# EAGLE board LedDancer_Schem (EAGLE 9.6.2)
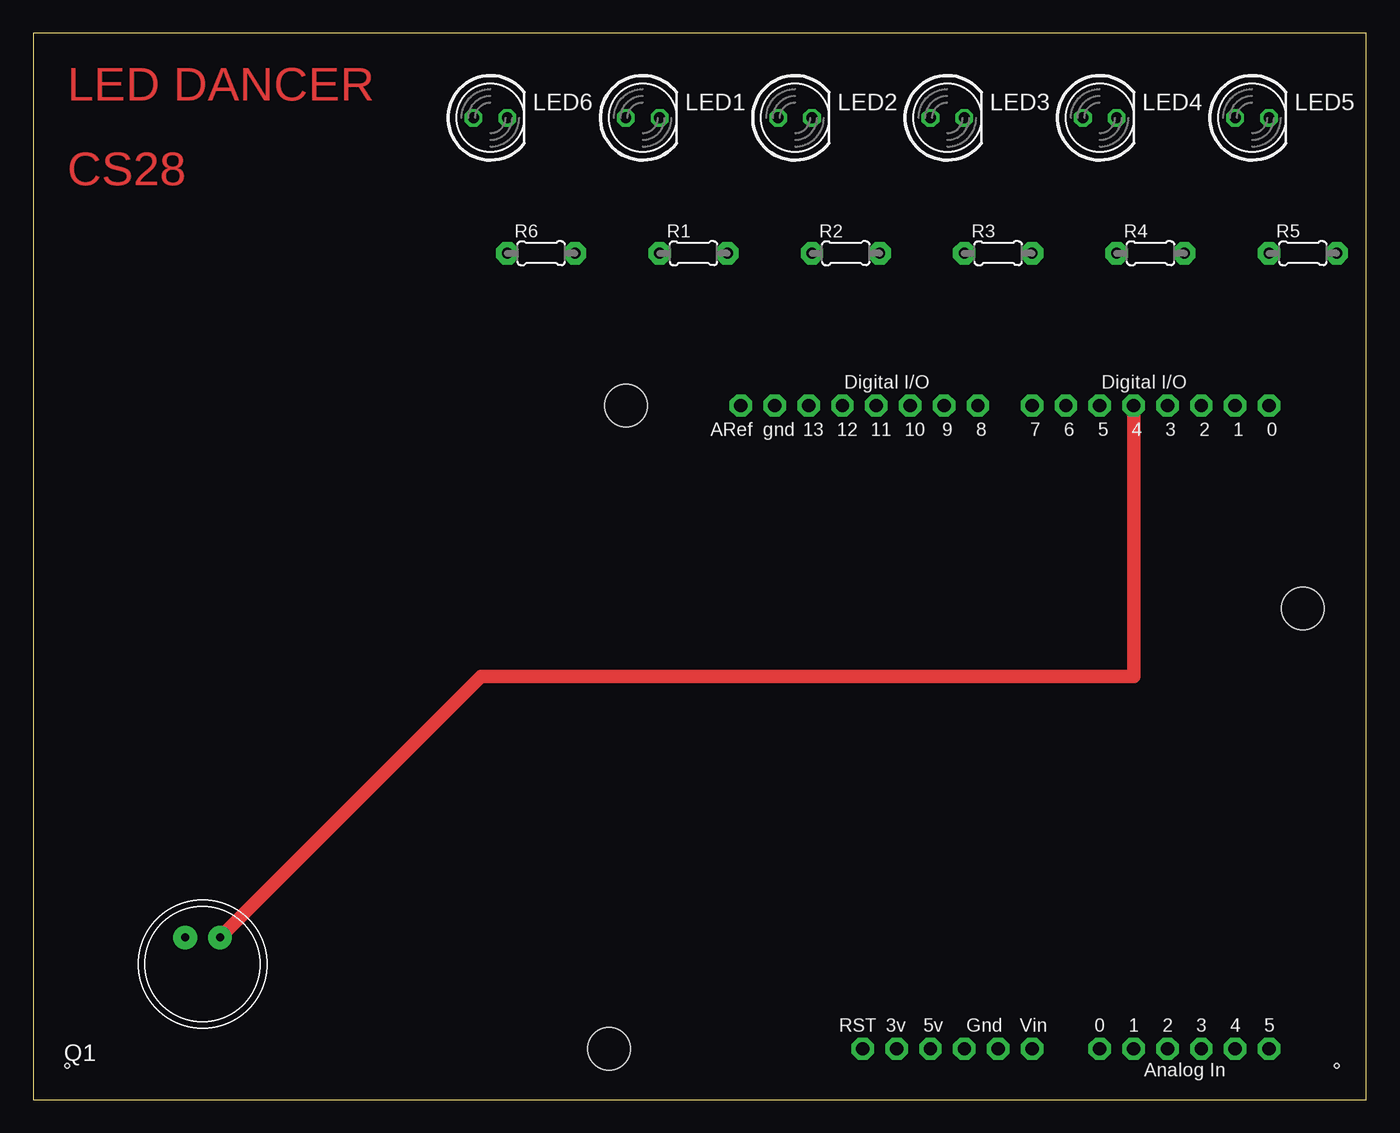
[diagram p0: board, top side]
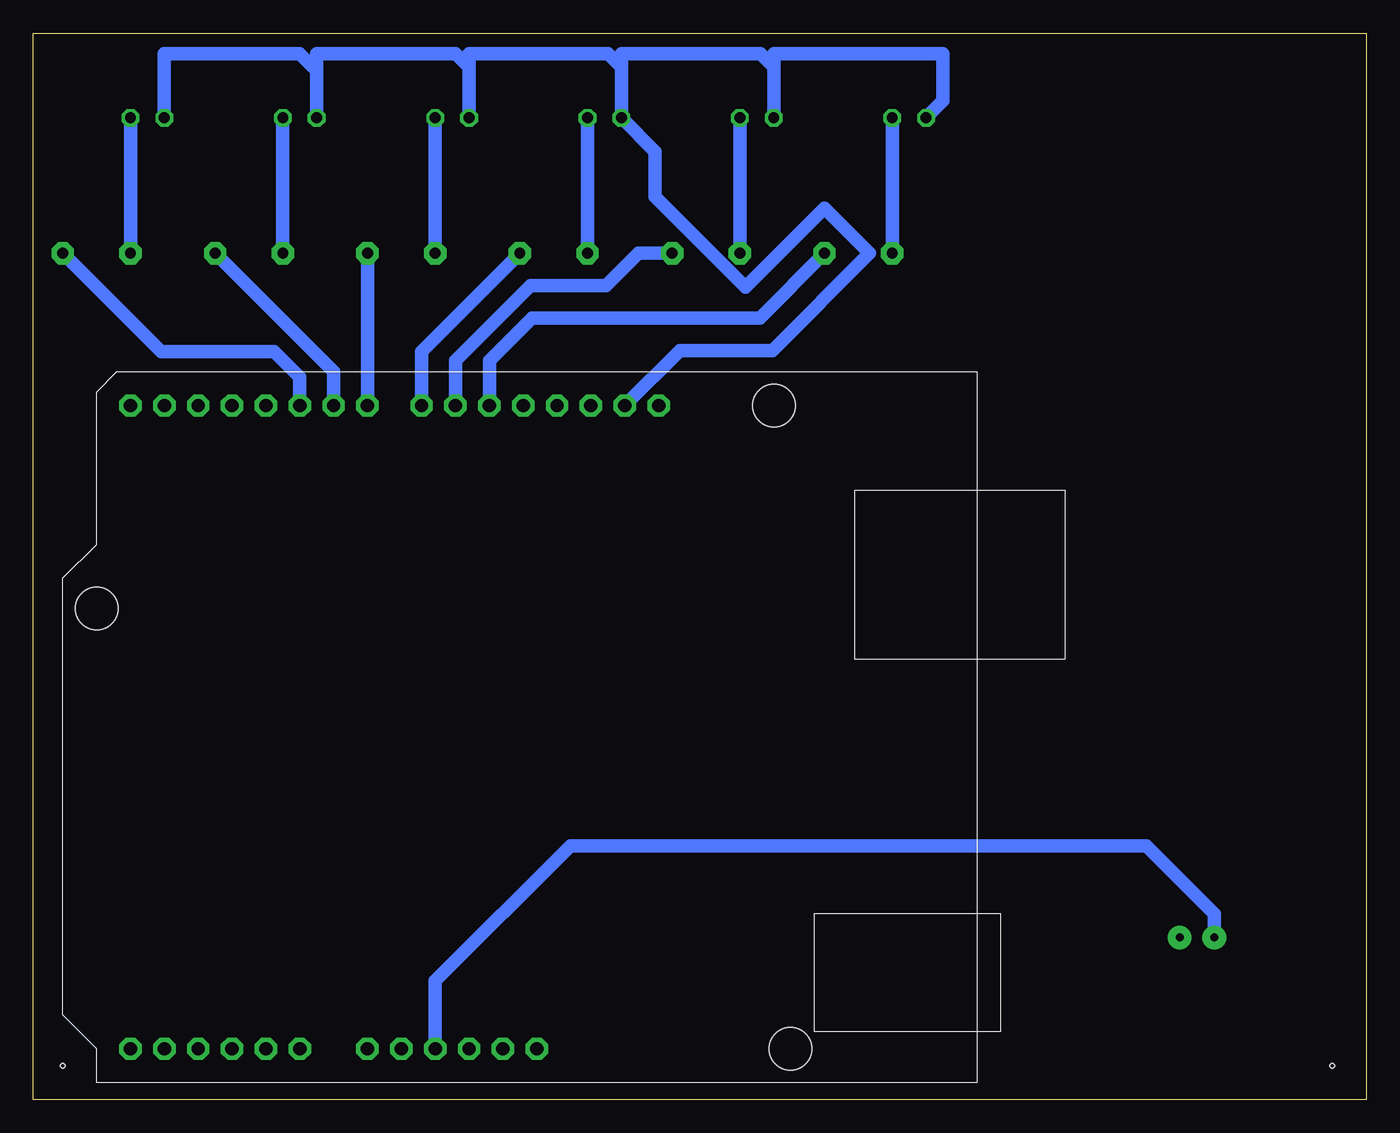
[diagram p1: board, bottom side, seen from below]

Size 100 x 80 mm. Coordinates in mm from the lower left corner, seen from the top.
Outline: 0,0 100,0 100,80 0,80 0,0
Copper layers (1*16): Top 0.035mm / dielectric 1.5mm / Bottom 0.035mm
Design rules "default": minimum track width 6mil, minimum drill 0.35mm, track to track 6mil, track to pad 6mil, pad to pad 6mil, via to via 6mil, smd to smd 6mil, copper to edge 40mil, drill to drill 6mil, minimum pad ring 10mil, minimum via ring 8mil, stop-mask expansion 4mil, vias tented up to drill 0mil, thermal gap 10mil
Holes 0.35 mm at 2.54,2.54 97.79,2.54

## Footprints (pad centres in the part's own frame; a part is rotated, then mirrored left to right if it is on the bottom)
LED5MM = drill 0.813 octagon: A -1.27,0; K 1.27,0
9.7ELECTRET = drill 0.6 pad 1.778: + 1.3,2; - -1.3,2
0204/5 = drill 0.813 pad 1.676 octagon: 1 -2.54,0; 2 2.54,0
ARDUINO-BPLACE = drill 1 pad 1.676 octagon: 3V 35.56,2.54; 5V 38.1,2.54; A0 50.8,2.54; A1 53.34,2.54; A2 55.88,2.54; A3 58.42,2.54; A4 60.96,2.54; A5 63.5,2.54; AREF 23.876,50.8; D0 63.5,50.8; D1 60.96,50.8; D2 58.42,50.8; D3 55.88,50.8; D4 53.34,50.8; D5 50.8,50.8; D6 48.26,50.8; D7 45.72,50.8; D8 41.656,50.8; D9 39.116,50.8; D10 36.576,50.8; D11 34.036,50.8; D12 31.496,50.8; D13 28.956,50.8; GND 26.416,50.8; GND1 43.18,2.54; GND2 40.64,2.54; RESET 33.02,2.54; VIN 45.72,2.54 | hole 3.2: 15.24,50.8; 66.04,35.56; 13.97,2.54

## Placement (x,y rotation side)
LED1  [LED5MM]  45.72,73.66 0 top
LED2  [LED5MM]  57.15,73.66 0 top
LED3  [LED5MM]  68.58,73.66 0 top
LED4  [LED5MM]  80.01,73.66 0 top
LED5  [LED5MM]  91.44,73.66 0 top
LED6  [LED5MM]  34.29,73.66 0 top
Q1  [9.7ELECTRET]  12.7,10.16 0 top
R1  [0204/5]  49.53,63.5 0 top
R2  [0204/5]  60.96,63.5 0 top
R3  [0204/5]  72.39,63.5 0 top
R4  [0204/5]  83.82,63.5 0 top
R5  [0204/5]  95.25,63.5 0 top
R6  [0204/5]  38.1,63.5 0 top
U$1  ARDUINO-BPLACE  [ARDUINO-BPLACE]  29.21,1.27 0 top

## Library data of the parts
LED1-LED6 = led
Q1 R1-R6 U$1 = adafruit

## Nets
3V: U$1.3V
5V: U$1.5V
GND1: U$1.GND1
N$1: LED1.K R1.1
N$2: LED2.K R2.1
N$3: LED3.K R3.1
N$4: LED4.K R4.1
N$5: LED5.K R5.1
N$6: R5.2 U$1.D5
N$7: R4.2 U$1.D6
N$8: R3.2 U$1.D7
N$9: R2.2 U$1.D8
N$10: R1.2 U$1.D9
N$11: LED6.K R6.1
N$12: R6.2 U$1.D10
N$13: Q1.+ U$1.D4
N$14: Q1.- U$1.GND2
N$16: LED1.A LED2.A LED3.A LED4.A LED5.A LED6.A U$1.GND
VIN: U$1.VIN

## Tracks (layer width: path | path; a pad name or v marks a point on that pad's centre or on a via)
N$1
  Bottom 1.016: LED1.K R1.1
N$2
  Bottom 1.016: LED2.K R2.1
N$3
  Bottom 1.016: LED3.K R3.1
N$4
  Bottom 1.016: LED4.K R4.1
N$5
  Bottom 1.016: LED5.K R5.1
N$6
  Bottom 1.016: R5.2 90.4,56.11 81.93,56.11 80.01,54.19 U$1.D5
N$7
  Bottom 1.016: R4.2 77.47,54.61 U$1.D6
N$8
  Bottom 1.016: R3.2 U$1.D7
N$9
  Bottom 1.016: R2.2 70.87,56.13 U$1.D8
N$10
  Bottom 1.016: R1.2 54.61,63.5 57.02,61.09 62.7,61.09 68.33,55.46 U$1.D9
N$11
  Bottom 1.016: LED6.K R6.1
N$12
  Bottom 1.016: R6.2 45.49,58.65 62.6,58.65 65.79,55.46 U$1.D10
N$13
  Top 1.016: Q1.+ 33.59,31.75 82.55,31.75 U$1.D4
N$14
  Bottom 1.016: Q1.- 11.4,13.94 16.51,19.05 59.69,19.05 69.85,8.89 U$1.GND2
N$16
  Bottom 1.016: LED6.A 31.75,74.93 31.75,78.48 44.45,78.48 44.45,77.47 | 44.45,77.47 LED1.A | 55.88,77.47 LED2.A 53.34,71.12 53.34,67.73 46.57,60.96 40.64,66.89 37.25,63.5 44.54,56.21 51.49,56.21 U$1.GND | 55.88,77.47 55.88,78.48 45.46,78.48 44.45,77.47 | LED3.A 67.31,77.47 | 67.31,77.47 67.31,78.48 56.89,78.48 55.88,77.47 | LED4.A 78.74,77.21 | 78.74,77.21 78.74,78.48 68.32,78.48 67.31,77.47 | LED5.A 90.17,78.48 80.01,78.48 78.74,77.21

## Text on the board
Top: LED DANCER | CS28